# Altium PCB KNX_MCU_24CH_V1.2.PcbDoc (part 1 of 2)
Units mm, origin at the board's own origin, x right, y up, seen from the top; angles counter-clockwise.
Board outline 205.5 x 64.4 mm, 2 copper layers (F.Cu, B.Cu), stack 1.581 mm thick; 138 components, 141 nets, 447 pads, 311 vias.
Unrouted connection lines stored in the file: 65.
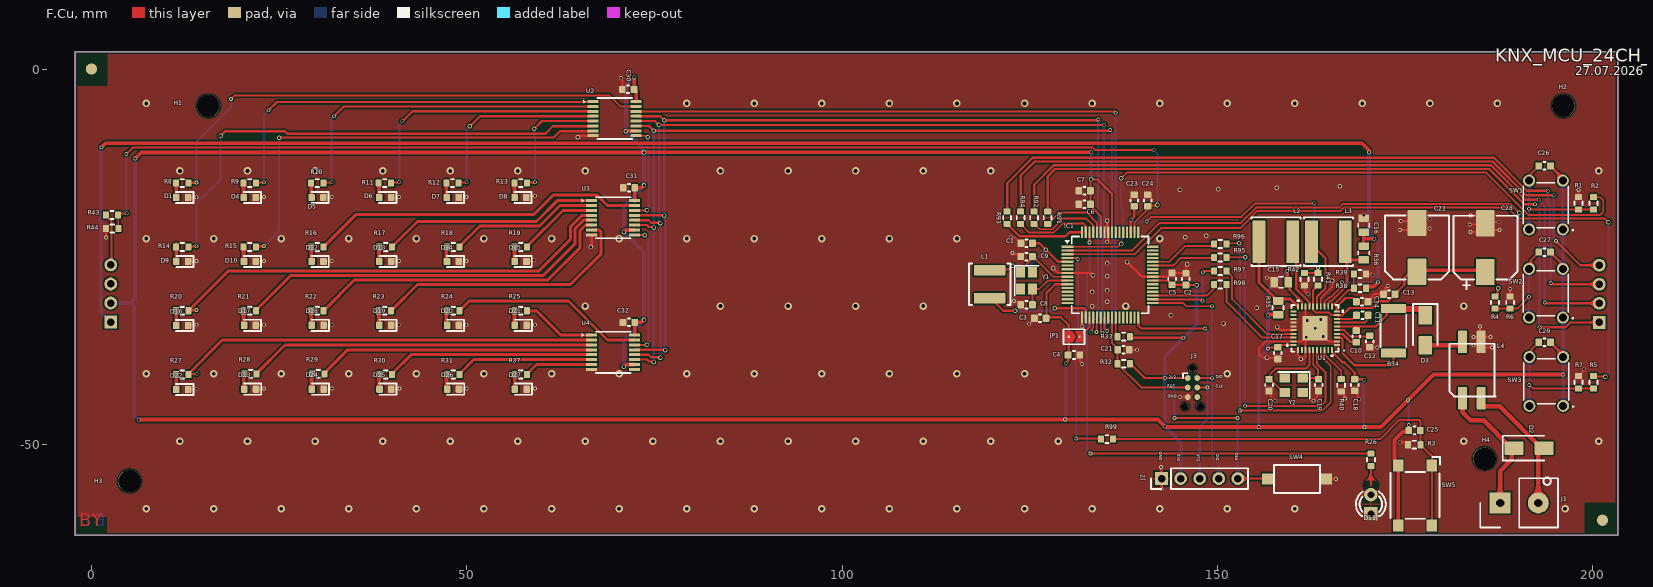
[diagram p0: F.Cu view]
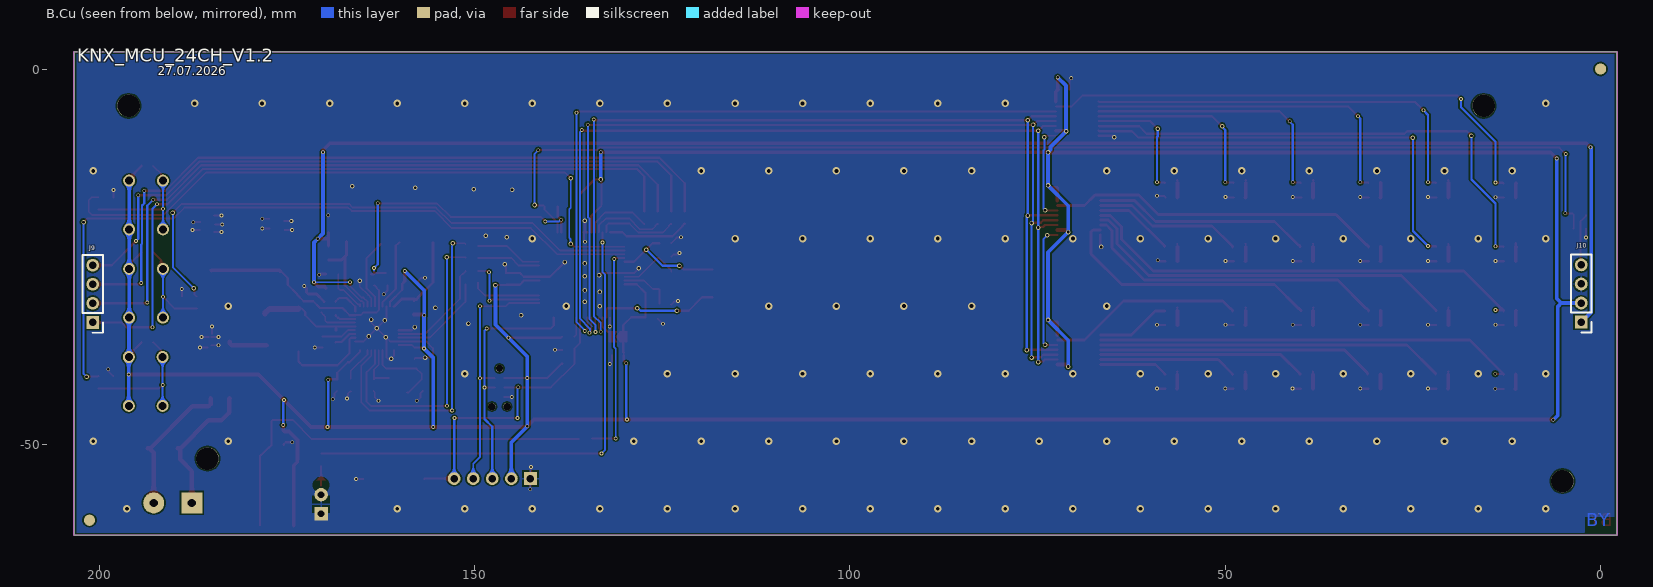
[diagram p1: B.Cu view, seen from below]

## Layer stack, top to bottom
F.Mask: solder mask 0.0102, Solder Resist, Dk 3.5
F.Cu: signal copper 0.0356
Dielectric 1: dielectric 1.51, FR-4, Dk 4.8
B.Cu: signal copper 0.0356
B.Mask: solder mask 0.0102, Solder Resist, Dk 3.5

## Board outline
-2.17,-62.1 -2.17,2.3 203.33,2.3 203.33,-62.1

## Design rules (kind name [scope] priority, off if disabled: settings)
Clearance "Clearence 0,5_Polygon" [InNamedPolygon('F.Cu--2') OR InNamedPolygon('B.Cu--2') OR InNamedPolygon('F.Cu--3') OR InNamedPolygon('B.Cu--3')] p1: gap=0.5 ignorepadtopadclearanceinfootprint=FALSE
Clearance "Clearence 0,4_Polygon" [InNamedPolygon('F.Cu--1') OR InNamedPolygon('B.Cu--1')] p2: gap=0.4 ignorepadtopadclearanceinfootprint=FALSE
Clearance "Clearence 0,3_Polygon" [InNamedPolygon('F.Cu-') OR InNamedPolygon('B.Cu-')] p3: gap=0.3 ignorepadtopadclearanceinfootprint=FALSE
Clearance [All] p4: gap=0.2 ignorepadtopadclearanceinfootprint=TRUE
ComponentClearance [All] p1: gap=0 collisioncheckmode=3 verticalgap=0.01 showdistances=FALSE
MinimumSolderMaskSliver [All] p1: minsoldermaskwidth=0
PolygonConnect [All] p1: thpad.connectstyle=Relief thpad.reliefconductorwidth=0.254 thpad.reliefentries=4 thpad.polygonreliefangle="90 Angle" thpad.airgapwidth=0.254 smdpad.connectstyle=Direct smdpad.reliefconductorwidth=0.254 smdpad.reliefentries=4 smdpad.polygonreliefangle="90 Angle" smdpad.airgapwidth=0.254 via.connectstyle=Direct via.reliefconductorwidth=0.254 via.reliefentries=4 via.polygonreliefangle="90 Angle" via.airgapwidth=0.254
PolygonConnect Polygon_B.Cu--3_ConnectDirect [IsNamedPolygon('B.Cu--3') vs IsVia] p2: connectstyle=Direct reliefconductorwidth=0.254 reliefentries=4 polygonreliefangle="90 Angle" airgapwidth=0.254
PolygonConnect Polygon_B.Cu--3_ConnectRelief45 [IsNamedPolygon('B.Cu--3') vs (IsThruPin or IsSMTPin) and (PadShape_AllLayers = 'Round')] p3: connectstyle=Relief reliefconductorwidth=0.4 reliefentries=4 polygonreliefangle="45 Angle" airgapwidth=0.4
PolygonConnect Polygon_B.Cu--3_ConnectRelief90 [IsNamedPolygon('B.Cu--3') vs (IsThruPin or IsSMTPin) and (PadShape_AllLayers <> 'Round')] p4: connectstyle=Relief reliefconductorwidth=0.4 reliefentries=4 polygonreliefangle="90 Angle" airgapwidth=0.4
PolygonConnect Polygon_F.Cu--3_ConnectDirect [IsNamedPolygon('F.Cu--3') vs IsVia] p5: connectstyle=Direct reliefconductorwidth=0.254 reliefentries=4 polygonreliefangle="90 Angle" airgapwidth=0.254
PolygonConnect Polygon_F.Cu--3_ConnectRelief45 [IsNamedPolygon('F.Cu--3') vs (IsThruPin or IsSMTPin) and (PadShape_AllLayers = 'Round')] p6: connectstyle=Relief reliefconductorwidth=0.4 reliefentries=4 polygonreliefangle="45 Angle" airgapwidth=0.4
PolygonConnect Polygon_F.Cu--3_ConnectRelief90 [IsNamedPolygon('F.Cu--3') vs (IsThruPin or IsSMTPin) and (PadShape_AllLayers <> 'Round')] p7: connectstyle=Relief reliefconductorwidth=0.4 reliefentries=4 polygonreliefangle="90 Angle" airgapwidth=0.4
PolygonConnect Polygon_B.Cu--2_ConnectDirect [IsNamedPolygon('B.Cu--2') vs IsVia] p8: connectstyle=Direct reliefconductorwidth=0.254 reliefentries=4 polygonreliefangle="90 Angle" airgapwidth=0.254
PolygonConnect Polygon_B.Cu--2_ConnectRelief45 [IsNamedPolygon('B.Cu--2') vs (IsThruPin or IsSMTPin) and (PadShape_AllLayers = 'Round')] p9: connectstyle=Relief reliefconductorwidth=0.4 reliefentries=4 polygonreliefangle="45 Angle" airgapwidth=0.4
PolygonConnect Polygon_B.Cu--2_ConnectRelief90 [IsNamedPolygon('B.Cu--2') vs (IsThruPin or IsSMTPin) and (PadShape_AllLayers <> 'Round')] p10: connectstyle=Relief reliefconductorwidth=0.4 reliefentries=4 polygonreliefangle="90 Angle" airgapwidth=0.4
PolygonConnect Polygon_F.Cu--2_ConnectDirect [IsNamedPolygon('F.Cu--2') vs IsVia] p11: connectstyle=Direct reliefconductorwidth=0.254 reliefentries=4 polygonreliefangle="90 Angle" airgapwidth=0.254
PolygonConnect Polygon_F.Cu--2_ConnectRelief45 [IsNamedPolygon('F.Cu--2') vs (IsThruPin or IsSMTPin) and (PadShape_AllLayers = 'Round')] p12: connectstyle=Relief reliefconductorwidth=0.4 reliefentries=4 polygonreliefangle="45 Angle" airgapwidth=0.4
PolygonConnect Polygon_F.Cu--2_ConnectRelief90 [IsNamedPolygon('F.Cu--2') vs (IsThruPin or IsSMTPin) and (PadShape_AllLayers <> 'Round')] p13: connectstyle=Relief reliefconductorwidth=0.4 reliefentries=4 polygonreliefangle="90 Angle" airgapwidth=0.4
PolygonConnect Polygon_B.Cu--1_ConnectDirect [IsNamedPolygon('B.Cu--1') vs IsVia] p14: connectstyle=Direct reliefconductorwidth=0.254 reliefentries=4 polygonreliefangle="90 Angle" airgapwidth=0.254
PolygonConnect Polygon_B.Cu--1_ConnectRelief45 [IsNamedPolygon('B.Cu--1') vs (IsThruPin or IsSMTPin) and (PadShape_AllLayers = 'Round')] p15: connectstyle=Relief reliefconductorwidth=0.4 reliefentries=4 polygonreliefangle="45 Angle" airgapwidth=0.4
PolygonConnect Polygon_B.Cu--1_ConnectRelief90 [IsNamedPolygon('B.Cu--1') vs (IsThruPin or IsSMTPin) and (PadShape_AllLayers <> 'Round')] p16: connectstyle=Relief reliefconductorwidth=0.4 reliefentries=4 polygonreliefangle="90 Angle" airgapwidth=0.4
PolygonConnect Polygon_F.Cu--1_ConnectDirect [IsNamedPolygon('F.Cu--1') vs IsVia] p17: connectstyle=Direct reliefconductorwidth=0.254 reliefentries=4 polygonreliefangle="90 Angle" airgapwidth=0.254
PolygonConnect Polygon_F.Cu--1_ConnectRelief45 [IsNamedPolygon('F.Cu--1') vs (IsThruPin or IsSMTPin) and (PadShape_AllLayers = 'Round')] p18: connectstyle=Relief reliefconductorwidth=0.4 reliefentries=4 polygonreliefangle="45 Angle" airgapwidth=0.4
PolygonConnect Polygon_F.Cu--1_ConnectRelief90 [IsNamedPolygon('F.Cu--1') vs (IsThruPin or IsSMTPin) and (PadShape_AllLayers <> 'Round')] p19: connectstyle=Relief reliefconductorwidth=0.4 reliefentries=4 polygonreliefangle="90 Angle" airgapwidth=0.4
PolygonConnect Polygon_B.Cu-_ConnectDirect [IsNamedPolygon('B.Cu-') vs IsVia] p20: connectstyle=Direct reliefconductorwidth=0.254 reliefentries=4 polygonreliefangle="90 Angle" airgapwidth=0.254
PolygonConnect Polygon_B.Cu-_ConnectRelief45 [IsNamedPolygon('B.Cu-') vs (IsThruPin or IsSMTPin) and (PadShape_AllLayers = 'Round')] p21: connectstyle=Relief reliefconductorwidth=0.3 reliefentries=4 polygonreliefangle="45 Angle" airgapwidth=0.3
PolygonConnect Polygon_B.Cu-_ConnectRelief90 [IsNamedPolygon('B.Cu-') vs (IsThruPin or IsSMTPin) and (PadShape_AllLayers <> 'Round')] p22: connectstyle=Relief reliefconductorwidth=0.3 reliefentries=4 polygonreliefangle="90 Angle" airgapwidth=0.3
PolygonConnect Polygon_F.Cu-_ConnectDirect [IsNamedPolygon('F.Cu-') vs IsVia] p23: connectstyle=Direct reliefconductorwidth=0.254 reliefentries=4 polygonreliefangle="90 Angle" airgapwidth=0.254
PolygonConnect Polygon_F.Cu-_ConnectRelief45 [IsNamedPolygon('F.Cu-') vs (IsThruPin or IsSMTPin) and (PadShape_AllLayers = 'Round')] p24: connectstyle=Relief reliefconductorwidth=0.3 reliefentries=4 polygonreliefangle="45 Angle" airgapwidth=0.3
PolygonConnect Polygon_F.Cu-_ConnectRelief90 [IsNamedPolygon('F.Cu-') vs (IsThruPin or IsSMTPin) and (PadShape_AllLayers <> 'Round')] p25: connectstyle=Relief reliefconductorwidth=0.3 reliefentries=4 polygonreliefangle="90 Angle" airgapwidth=0.3
RoutingVias [All] p1: holewidth=0.711 width=1.27 viastyle="Through Hole" minholewidth=0.711 minwidth=1.27 maxholewidth=0.711 maxwidth=1.27
SilkToSilkClearance [All] p1: silktosilkclearance=0
SilkToSolderMaskClearance [IsPad] p1: minsilkscreentomaskgap=0 clearancetoexposedcopper=TRUE
SolderMaskExpansion [All] p1: expansion=0 istentingtop=FALSE
SupplyNets "Schematic Supply Nets_3" [InNet('+3V3')] p1: voltage=0.000
SupplyNets "Schematic Supply Nets_2" [InNet('GND')] p2: voltage=0.000
SupplyNets "Schematic Supply Nets" [InNet('+12V')] p3: voltage=0.000
Width [All] p1: maxlimit=10 minlimit=0.2 preferedwidth=0.254 minimp=50.000000 maximp=50.000000 favimp=50.000000
26 further rules are at their usual default settings.

## Classes and differential pairs
component class UI_BUTTON_LED: C26 C27 C29 C30 C31 C32 D1 D4 D5 D6 D7 D8 D9 D10 D12 D13 D14 D15 D16 D17 D18 D19 D20 D21 D22 D23 D24 D25 D26 D27 R1 R2 R4 R5 R6 R7 R8 R9 R10 R11 R12 R13 R14 R15 R16 R17 R18 R19 R20 R21 R22 R23 R24 R25 R27 R28 R29 R30 R31 R37 SW1 SW2 SW3 U2 U3 U4
component class "Transceiver for KNx": C10 C11 C12 C13 C14 C15 C16 C17 C18 C19 C20 C22 C28 D2 D3 L2 L3 L4 R34 R35 R36 R38 R39 R40 U1 Y2
component class MCU: C1 C2 C3 C4 C5 C6 C7 C8 C9 C21 IC1 JP1 L1 R32 R33 SW4 Y1
component class KNX-MCU-CONTROL_V0.2: C23 C24 C25 D11 H1 H2 H3 H4 J1 J2 J3 R3 R26 R41 R42 R43 R44 R95 R96 R97 R98 R99 SW5
component class Connectors: J9 J10 R91 R92 R93 R94

## Components (designator, comment, footprint, x,y, rotation, side; value= is the part's Value field where it differs from the comment)
C1 "4.7uF" C_0603_1608METRIC 124.58,-23.2 r0 top
C2 "1uF" C_0603_1608METRIC 145.788,-27.987 r270 top
C3 "100nF" C_0603_1608METRIC 126.38,-33.2 r0 top
C4 "100nF" C_0603_1608METRIC 130.88,-38.1 r180 top
C5 "100nF" C_0603_1608METRIC 143.948,-27.957 r270 top
C6 "100nF" C_0603_1608METRIC 132.3,-18.013 r0 top
C7 "2.2uF" C_0603_1608METRIC 132.3,-16.213 r0 top
C8 "15pF" C_0603_1608METRIC 124.58,-31.4 r180 top
C9 "15pF" C_0603_1608METRIC 124.58,-25 r180 top
C10 "47nF" C_0603_1608METRIC 168.48,-35.625 r90 top
C11 "220nF" C_0603_1608METRIC 169.28,-32.8 r0 top
C12 "100nF" C_0603_1608METRIC 170.28,-36.3 r90 top
C13 "100nF" C_0603_1608METRIC 172.88,-30 r180 top
C14 "1uF" C_0603_1608METRIC 169.28,-31 r180 top
C15 "10uF" C_0805_2012Metric 158.48,-28.4 r0 top
C16 "10uF" C_0805_2012Metric 169.48,-20.8 r270 top
C17 "100nF" C_0603_1608METRIC 158.027,-37.852 r90 top
C18 "100nF" C_0603_1608METRIC 168.28,-42.1 r90 top
C19 "10pF" C_0603_1608METRIC 163.48,-42.1 r270 top
C20 "10pF" C_0603_1608METRIC 156.88,-42.1 r270 top
C21 "100nF" C_0603_1608METRIC 137.48,-37.4 r180 top
C22 "100uF" CP_Elec_8x10#1 176.58,-23.75 r90 top
C23 "100nF" C_0603_1608METRIC 138.9,-17.512 r90 top
C24 "100nF" C_0603_1608METRIC 140.7,-17.512 r90 top
C25 "100nF" C_0603_1608METRIC 176.252,-48.143 r180 top
C26 "100nF" C_0603_1608METRIC 193.58,-12.9 r180 top
C27 "100nF" C_0603_1608METRIC 193.58,-24.4 r180 top
C28 "470uf/16V" CP_Elec_8x10#2 185.68,-23.8 r270 top
C29 "100nF" C_0603_1608METRIC 193.58,-36.4 r180 top
C30 "100nF" C_0603_1608METRIC 71.5,-2.713 r180 top
C31 "100nF" C_0603_1608METRIC 71.6,-15.813 r0 top
C32 "100nF" C_0603_1608METRIC 71.594,-33.736 r0 top
D1 "LED" LED_0603_1608METRIC 12.093,-17.113 r180 top locked
D2 "SMAJ40CA-HT" D_SMA 191.5,-50.5 r0 top
D3 "SS28" D_SMA 177.68,-34.8 r270 top
D4 "LED" LED_0603_1608METRIC 21.105,-17.113 r180 top locked
D5 "LED" LED_0603_1608METRIC 30.118,-17.113 r180 top locked
D6 "LED" LED_0603_1608METRIC 39.13,-17.113 r180 top locked
D7 "LED" LED_0603_1608METRIC 48.143,-17.113 r180 top locked
D8 "LED" LED_0603_1608METRIC 57.155,-17.113 r180 top locked
D9 "LED" LED_0603_1608METRIC 12.105,-25.625 r180 top locked
D10 "LED" LED_0603_1608METRIC 21.118,-25.625 r180 top locked
D11 "Led_Green" LED_D3.0MM 170.43,-57.97 r90 top locked
D12 "LED" LED_0603_1608METRIC 30.13,-25.625 r180 top locked
D13 "LED" LED_0603_1608METRIC 39.143,-25.625 r180 top locked
D14 "LED" LED_0603_1608METRIC 48.155,-25.625 r180 top locked
D15 "LED" LED_0603_1608METRIC 57.168,-25.625 r180 top locked
D16 "LED" LED_0603_1608METRIC 12.093,-34.162 r180 top locked
D17 "LED" LED_0603_1608METRIC 21.13,-34.137 r180 top locked
D18 "LED" LED_0603_1608METRIC 30.143,-34.137 r180 top locked
D19 "LED" LED_0603_1608METRIC 39.155,-34.137 r180 top locked
D20 "LED" LED_0603_1608METRIC 48.168,-34.137 r180 top locked
D21 "LED" LED_0603_1608METRIC 57.18,-34.137 r180 top locked
D22 "LED" LED_0603_1608METRIC 12.093,-42.687 r180 top locked
D23 "LED" LED_0603_1608METRIC 21.143,-42.65 r180 top locked
D24 "LED" LED_0603_1608METRIC 30.155,-42.65 r180 top locked
D25 "LED" LED_0603_1608METRIC 39.168,-42.65 r180 top locked
D26 "LED" LED_0603_1608METRIC 48.18,-42.65 r180 top locked
D27 "LED" LED_0603_1608METRIC 57.193,-42.65 r180 top locked
H1 "MountingHole" MOUNTINGHOLE_3MM 15.58,-4.9 r270 top
H2 "MountingHole" MOUNTINGHOLE_3MM 196.08,-4.9 r270 top
H3 "MountingHole" MOUNTINGHOLE_3MM 5.08,-54.9 r270 top
H4 "MountingHole" MOUNTINGHOLE_3MM 185.58,-51.9 r270 top
IC1 "R7FA2L1AB3CFM" LQFP-64_10X10MM_P0.5MM 135.693,-27.427 r0 top locked
J1 "L-KLS8-2170-13" SAMTEC_HPM-02-01-X-S_STRAIGHT_1X02_PITCH5.08MM 187.65,-57.8 r90 top locked
J2 "Conn_01x05" PinHeader_1x05_P2.54mm_Vertical 142.548,-54.557 r90 top
J3 "Conn_ARM_SWD_TagConnect_TC2030-NL" Tag-Connect_TC2030-IDC-NL_2x03_P1.27mm_Vertical 146.673,-42.427 r270 top
J9 "Conn_01x04" PINHEADER_1X04_P2.54MM_VERTICAL 200.86,-33.75 r0 bottom locked
J10 "Conn_01x04" PINHEADER_1X04_P2.54MM_VERTICAL 2.58,-33.71 r0 bottom locked
JP1 "SolderJumper_2_Open" SolderJumper-2_P1.3mm_Open_TrianglePad1.0x1.5mm 130.908,-35.657 r0 top
L1 "4.7uH" L_APV_ANR5012 119.65,-28.68 r270 top
L2 "220uH" L_APV_ANR6028 157.78,-23 r180 top
L3 "220uH" L_APV_ANR6028 164.78,-23 r0 top
L4 "50474C" L_CommonMode_50474C_7.5x5.9mm 183.88,-40.1 r90 top
R1 "10k" R_0603_1608METRIC 198.08,-17.9 r90 top
R2 "330R" R_0603_1608METRIC 200.08,-17.9 r270 top
R3 "10K" R_0603_1608METRIC 176.227,-50.043 r0 top
R4 "330R" R_0603_1608METRIC 186.98,-31.1 r270 top
R5 "330R" R_0603_1608METRIC 200.08,-41.725 r270 top
R6 "10k" R_0603_1608METRIC 188.98,-31.1 r90 top
R7 "10k" R_0603_1608METRIC 198.08,-41.725 r90 top
R8 "1k" R_0603_1608METRIC 12.1,-15.2 r180 top
R9 "1k" R_0603_1608METRIC 21.1,-15.2 r180 top
R10 "1k" R_0603_1608METRIC 30.1,-15.2 r180 top
R11 "1k" R_0603_1608METRIC 39.1,-15.2 r180 top
R12 "1k" R_0603_1608METRIC 48.1,-15.2 r180 top
R13 "1k" R_0603_1608METRIC 57.2,-15.2 r180 top
R14 "1k" R_0603_1608METRIC 12.1,-23.7 r180 top
R15 "1k" R_0603_1608METRIC 21.1,-23.7 r180 top
R16 "1k" R_0603_1608METRIC 30.1,-23.7 r180 top
R17 "1k" R_0603_1608METRIC 39.2,-23.7 r180 top
R18 "1k" R_0603_1608METRIC 48.2,-23.7 r180 top
R19 "1k" R_0603_1608METRIC 57.2,-23.7 r180 top
R20 "1k" R_0603_1608METRIC 12.1,-32.2 r180 top
R21 "1k" R_0603_1608METRIC 21.1,-32.2 r180 top
R22 "1k" R_0603_1608METRIC 30.1,-32.2 r180 top
R23 "1k" R_0603_1608METRIC 39.1,-32.2 r180 top
R24 "1k" R_0603_1608METRIC 48.2,-32.2 r180 top
R25 "1k" R_0603_1608METRIC 57.2,-32.2 r180 top
R26 "1K" R_0603_1608METRIC 170.43,-52.07 r270 top
R27 "1k" R_0603_1608METRIC 12.1,-40.7 r180 top
R28 "1k" R_0603_1608METRIC 21.2,-40.6 r180 top
R29 "1k" R_0603_1608METRIC 30.2,-40.6 r180 top
R30 "1k" R_0603_1608METRIC 39.2,-40.7 r180 top
R31 "1k" R_0603_1608METRIC 48.2,-40.7 r180 top
R32 "10K" R_0603_1608METRIC 137.498,-39.257 r0 top
R33 "10K" R_0603_1608METRIC 137.508,-35.657 r0 top
R34 "27R" R_2512_6332Metric 173.437,-34.872 r270 top
R35 "1R" R_0805_2012Metric 158.08,-31.8 r270 top
R36 "1R" R_0805_2012Metric 169.48,-24.5 r90 top
R37 "1k" R_0603_1608METRIC 57.2,-40.7 r180 top
R38 "91K" R_0603_1608METRIC 168.98,-29.2 r180 top
R39 "10K" R_0603_1608METRIC 168.98,-27.3 r0 top
R40 "20k" R_0603_1608METRIC 166.477,-42.122 r90 top
R41 "220k" R_0603_1608METRIC 163.38,-28 r90 top
R42 "27k" R_0603_1608METRIC 161.58,-28 r270 top
R43 "100k" R_0603_1608METRIC 2.746,-19.439 r0 top
R44 "27k" R_0603_1608METRIC 2.766,-21.249 r180 top
R91 "33R" R_0603_1608METRIC 127.38,-19.8 r90 top
R92 "33R" R_0603_1608METRIC 125.58,-19.8 r90 top
R93 "33R" R_0603_1608METRIC 121.98,-19.8 r90 top
R94 "33R" R_0603_1608METRIC 123.78,-19.8 r90 top
R95 "33R" R_0603_1608METRIC 150.38,-25.1 r180 top
R96 "33R" R_0603_1608METRIC 150.38,-23.3 r180 top
R97 "33R" R_0603_1608METRIC 150.38,-26.9 r180 top
R98 "33R" R_0603_1608METRIC 150.38,-28.7 r180 top
R99 "330R" R_0603_1608METRIC 135.28,-49.3 r180 top
SW1 "TL1105BF160Q" TL1105 193.748,-18.117 r90 top locked
SW2 "TL1105BF160Q" TL1105 193.748,-29.867 r90 top locked
SW3 "TL1105BF160Q" TL1105 193.798,-41.617 r90 top locked
SW4 "SW_Push" SW_SPST_CK_RS282G05A3 160.58,-54.6 r0 top
SW5 "SW_Push" SW_SPST_OMRON_B3FS-100XP 176.32,-56.8 r270 top locked
U1 "NCN5130MNTWG" QFN40_485AU-01_ONS 162.997,-34.532 r180 top locked
U2 "74HC595PW,118" TSSOP-16_4.4X5MM_P0.65MM 69.7,-6.613 r0 top
U3 "74HC595PW,118" TSSOP-16_4.4X5MM_P0.65MM 69.5,-19.813 r0 top
U4 "74HC595PW,118" TSSOP-16_4.4X5MM_P0.65MM 69.5,-37.73 r0 top
Y1 "20Mhz" Crystal_SMD_SeikoEpson_FA238-4Pin_3.2x2.5mm 124.588,-28.202 r270 top
Y2 "16Mhz" Crystal_SMD_SeikoEpson_FA238V-4Pin_3.2x2.5mm 160.187,-42.122 r180 top

## Footprints (in the part's own frame and the unit in brackets; to place one, negate y for a bottom-side part, rotate by r counter-clockwise, add the part's x,y. Pads: shape width x height; smd on the part's side, far side on the other; paste and mask are expansions set on the pad)
C_0603_1608METRIC [mm]
  rrect25% 0.9x0.95 smd mask+0.05: 1(-0.771,-0.005) 2(0.779,-0.005)
  silkscreen extent -0.14,-0.52 0.14,0.5
C_0805_2012Metric [mm]
  rrect25% 1x1.45 smd mask+0.05: 1(-0.95,0) 2(0.95,0)
  silkscreen extent -0.26,-0.73 0.26,0.73
CP_Elec_8x10#1 [mm]
  rrect10% 3.5x2.5 smd mask+0.05: 1(-3.25,0) 2(3.25,0)
  silkscreen extent -4.26,-4.26 4.26,4.26
CP_Elec_8x10#2 [mm]
  rrect10% 3.5x2.5 smd mask+0.05: 1(3.25,0) 2(-3.25,0)
  silkscreen extent -4.26,-4.26 5.5,4.26
Crystal_SMD_SeikoEpson_FA238-4Pin_3.2x2.5mm [mm]
  rect 1.4x1.2 smd mask+0.05: 1(-1.1,-0.8) 2(1.1,0.8) 3(1.1,-0.8) 4(-1.1,0.8)
  silkscreen extent -2,-1.6 2,1.6
Crystal_SMD_SeikoEpson_FA238V-4Pin_3.2x2.5mm [mm]
  rect 1.4x1.2 smd mask+0.05: 1(-1.2,-0.95) 2(1.2,-0.95) 3(1.2,0.95) 4(-1.2,0.95)
  silkscreen extent -2.1,-1.75 2.1,1.75
D_SMA [mm]
  rrect14% 2.5x1.8 smd mask+0.05: 1(-2,0) 2(2,0)
  silkscreen extent -3.51,-1.65 2,1.65
L_APV_ANR5012 [mm]
  rrect18% 1.4x4.2 smd mask+0.05: 1(-1.85,0) 2(1.85,0)
  silkscreen extent -2.76,-2.76 2.76,2.76
L_APV_ANR6028 [mm]
  rrect15% 1.7x5.7 smd mask+0.05: 1(-2.25,0) 2(2.25,0)
  silkscreen extent -3.26,-3.26 3.26,3.26
L_CommonMode_50474C_7.5x5.9mm [mm]
  rrect20% 3x1.2 smd mask+0.05: 1(-3.75,1.25) 2(-3.75,-1.25) 3(3.75,-1.25) 4(3.75,1.25)
  silkscreen extent -3.5,-3.14 3.5,3
LED_0603_1608METRIC [mm]
  rrect25% 0.875x0.95 smd mask+0.05: 1(-0.787,0) 2(0.787,0)
  silkscreen extent -1.49,-0.73 0.8,0.73, body extent -0.86,-0.4 0.74,0.4, height 0.6
LED_D3.0MM [mm]
  rect 1.8x1.8 hole 0.9 mask+0.05: 1(-1.27,0)
  round 1.8 hole 0.9 mask+0.05: 2(1.27,0)
  silkscreen extent -1.56,-1.99 1.67,1.99, body extent -1.6,-1.6 1.6,1.6, height 13
LQFP-64_10X10MM_P0.5MM [mm]
  rrect25% 1.55x0.3 smd mask+0.05: 1(-5.675,3.75) 2(-5.675,3.25) 3(-5.675,2.75) 4(-5.675,2.25) 5(-5.675,1.75) 6(-5.675,1.25) 7(-5.675,0.75) 8(-5.675,0.25) 9(-5.675,-0.25) 10(-5.675,-0.75) 11(-5.675,-1.25) 12(-5.675,-1.75) 13(-5.675,-2.25) 14(-5.675,-2.75) 15(-5.675,-3.25) 16(-5.675,-3.75) 33(5.675,-3.75) 34(5.675,-3.25) 35(5.675,-2.75) 36(5.675,-2.25) 37(5.675,-1.75) 38(5.675,-1.25) 39(5.675,-0.75) 40(5.675,-0.25) 41(5.675,0.25) 42(5.675,0.75) 43(5.675,1.25) 44(5.675,1.75) 45(5.675,2.25) 46(5.675,2.75) 47(5.675,3.25) 48(5.675,3.75)
  rrect25% 0.3x1.55 smd mask+0.05: 17(-3.75,-5.675) 18(-3.25,-5.675) 19(-2.75,-5.675) 20(-2.25,-5.675) 21(-1.75,-5.675) 22(-1.25,-5.675) 23(-0.75,-5.675) 24(-0.25,-5.675) 25(0.25,-5.675) 26(0.75,-5.675) 27(1.25,-5.675) 28(1.75,-5.675) 29(2.25,-5.675) 30(2.75,-5.675) 31(3.25,-5.675) 32(3.75,-5.675) 49(3.75,5.675) 50(3.25,5.675) 51(2.75,5.675) 52(2.25,5.675) 53(1.75,5.675) 54(1.25,5.675) 55(0.75,5.675) 56(0.25,5.675) 57(-0.25,5.675) 58(-0.75,5.675) 59(-1.25,5.675) 60(-1.75,5.675) 61(-2.25,5.675) 62(-2.75,5.675) 63(-3.25,5.675) 64(-3.75,5.675)
  silkscreen extent -6.06,-5.11 5.11,5.11, body extent -6,-6 6,6, height 1.7
MOUNTINGHOLE_3MM [mm]
  round 3 hole 3 mask+0.05: Un1(0,0)
PINHEADER_1X04_P2.54MM_VERTICAL [mm]
  rect 1.7x1.7 hole 1 mask+0.05: 1(0,0)
  round 1.7 hole 1 mask+0.05: 2(0,-2.54) 3(0,-5.08) 4(0,-7.62)
  silkscreen extent -1.38,-9 1.38,1.38, body extent -1.27,-8.98 1.27,1.31, height 15.75
PinHeader_1x05_P2.54mm_Vertical [mm]
  rect 1.7x1.7 hole 1 mask+0.05: 1(0,0)
  round 1.7 hole 1 mask+0.05: 2(0,-2.54) 3(0,-5.08) 4(0,-7.62) 5(0,-10.16)
  silkscreen extent -1.38,-11.54 1.38,1.38
QFN40_485AU-01_ONS [mil]
  rect 32x10 smd mask+1.97: 1(-114,88.58) 2(-114,68.9) 3(-114,49.21) 4(-114,29.53) 5(-114,9.84) 6(-114,-9.84) 7(-114,-29.53) 8(-114,-49.21) 9(-114,-68.9) 10(-114,-88.58) 21(114,-88.58) 22(114,-68.9) 23(114,-49.21) 24(114,-29.53) 25(114,-9.84) 26(114,9.84) 27(114,29.53) 28(114,49.21) 29(114,68.9) 30(114,88.58)
  rect 10x32 smd mask+1.97: 11(-88.58,-114) 12(-68.9,-114) 13(-49.21,-114) 14(-29.53,-114) 15(-9.84,-114) 16(9.84,-114) 17(29.53,-114) 18(49.21,-114) 19(68.9,-114) 20(88.58,-114) 31(88.58,114) 32(68.9,114) 33(49.21,114) 34(29.53,114) 35(9.84,114) 36(-9.84,114) 37(-29.53,114) 38(-49.21,114) 39(-68.9,114) 40(-88.58,114)
  rect 130x130 smd mask+1.97: 41(0,0)
  silkscreen extent -150,-150 150,150
R_0603_1608METRIC [mm]
  rrect25% 0.8x0.95 smd mask+0.05: 1(-0.825,0) 2(0.825,0)
  silkscreen extent -0.24,-0.52 0.24,0.52
R_0805_2012Metric [mm]
  rrect24% 1.025x1.4 smd mask+0.05: 1(-0.913,0) 2(0.913,0)
  silkscreen extent -0.23,-0.73 0.23,0.73
R_2512_6332Metric [mm]
  rrect20% 1.225x3.35 smd mask+0.05: 1(-2.963,0) 2(2.963,0)
  silkscreen extent -2.18,-1.71 2.18,1.71
SAMTEC_HPM-02-01-X-S_STRAIGHT_1X02_PITCH5.08MM [mm]
  rect 2.8x2.8 hole 1.1 mask+0.05: 1(0,0)
  round 2.8 hole 1.1 mask+0.05: 2(0,-5.08)
  silkscreen extent -3.28,-7.73 3.28,2.65, body extent -0.5,-5.58 0.5,0.5, height 15
SolderJumper-2_P1.3mm_Open_TrianglePad1.0x1.5mm [mm]
  rect 0.3x0.3 smd paste-0.3 mask+0.05: 1(-0.725,0) 2(0.725,0)
  F.Cu region: 0.275,0 -0.225,-0.75 -1.225,-0.75 -1.225,0.75 -0.225,0.75
  F.Cu region: 1.225,-0.75 0.075,-0.75 0.575,0 0.075,0.75 1.225,0.75
  silkscreen extent -1.4,-1 1.4,1
SW_SPST_CK_RS282G05A3 [mm]
  rect 1.5x1.5 smd mask+0.05: 1(-3.9,0) 2(3.9,0)
  silkscreen extent -3.06,-1.85 3.06,1.85
SW_SPST_OMRON_B3FS-100XP [mm]
  rect 1.6x1.4 smd mask+0.05: 1(-4,2.25) 1(4,2.25) 2(-4,-2.25) 2(4,-2.25)
  silkscreen extent -5.1,-3.25 3.1,3.3, body extent -3,-3 3,3, height 12
Tag-Connect_TC2030-IDC-NL_2x03_P1.27mm_Vertical [mil]
  round 31 smd paste-31 mask+1.97: 1(-50,-25) 2(-50,25) 3(0,-25) 4(0,25) 5(50,-25) 6(50,25)
  round 39 hole 39 mask+1.97: Un1(-100,0) Un2(100,40) Un3(100,-40)
  silkscreen extent -75,-50 -50,-25
TL1105 [mm]
  round 1.6 hole 1.06: 1(-3.25,-2.25) 2(3.25,-2.25) 3(-3.25,2.25) 4(3.25,2.25)
  silkscreen extent -3.4,-3.64 3,3, body extent -3,-3 3,3, height 20.5
TSSOP-16_4.4X5MM_P0.65MM [mm]
  rrect25% 1.475x0.4 smd mask+0.05: 1(-2.863,2.275) 2(-2.863,1.625) 3(-2.863,0.975) 4(-2.863,0.325) 5(-2.863,-0.325) 6(-2.863,-0.975) 7(-2.863,-1.625) 8(-2.863,-2.275) 9(2.863,-2.275) 10(2.863,-1.625) 11(2.863,-0.975) 12(2.863,-0.325) 13(2.863,0.325) 14(2.863,0.975) 15(2.863,1.625) 16(2.863,2.275)
  silkscreen extent -4.19,-2.74 2.31,2.74

## Part data
C1 C2 C3 C4 C5 C6 C7 C10 C11 C14 C21 C25 C26 C27 C29: library part C_3, Package=C_0603
  C1: MF="Samsung Electro-Mechanics", MP=CL10B475KQ8NQNC, OZD=C1608X7S1A475K080AC
  C2 C14: MF="Samsung Electro-Mechanics", MP=CL10B105KP8NNNC, OZD=CL10B105KP8NNNC
  C3 C4 C5 C6 C21 C25 C26 C27 C29: MF=YAGEO, MP=CC0603KRX7R9BB104
  C7: MF="Samsung Electro-Mechanics", MP=CL10B225KP8NNNC, OZD=CL10B225KP8NNNC
  C10: MF=SAMSUNG, MP=CL10B473KB8NNNC, OZD=CL10B473KB8NNNC
  C11: MF="Samsung Electro-Mechanics", MP=CL10B224KB8NNNC, OZD=CL10B224KB8NNNC
C8 C9 C19 C20: library part 20pF_0402_50V_5%, Package=C0603, MF="Samsung Electro-Mechanics"
  C8 C9: MP=CL10C150JB8NNNC, OZD=CL10C150JB8NNNC
  C19 C20: MP=CL10C100JB8NNNC, OZD=CL10C100JB8NNNC
C12 C13 C17 C18 C23 C24 C30 C31 C32: library part C_1, Package=C_0603
  C12 C13 C17 C18 C23 C24: MF="Samsung Electro-Mechanics", MP=CL10B104KB8NNNC
  C30 C31 C32: MF=YAGEO, MP=CC0603KRX7R9BB104
C15 C16: library part C_3, Package=C_0805, MF="Samsung Electro-Mechanics", MP=CL21B106KOQNNNE, OZD=CL21B106KOQNNNE
C22: library part C_US, Package="Radial D8 L10", MF=SUSCON, MP=CD035M101F10PKKKV00A
C28: library part C_US, OZD=EEEFK1C471P
D1 D4 D5 D6 D7 D8 D9 D10 D12 D13 D14 D15 D16 D17 D18 D19 D20 D21 D22 D23 D24 D25 D26 D27: Package=L_0603, MF=LITEON, MP=LTST-C190KFKT-5A, Sim.Pins="1=K 2=A"
D2: library part D_TVS, Package="DO214AC (SMA)", MF=HOTTECH, MP=SMAJ40CA-HT, OZD=SMAJ40CA-HT
D3: Package="DO214AC (SMA)", MF=HOTTECH, MP=SS18-HT, OZD=SS18-HT
D11: library part LED, Package="Through Hole,D=3mm", MF=TUOZHAN, MP=TZ-L2-03YYBYG1GDJ30-001, OZD=FYL-5014UBC1C-1MA-TR13
IC1: Package=LFQFP-64(10x10), MF=RENESAS, MP=R7FA2L1AB3CFM
J1: library part Screw_Terminal_01x02, Package="THT V/T", MF="KLS ELECTRONIC", MP=L-KLS8-2170-13, OZD=L-KLS8-2170-13
L1 L2 L3: library part L, Package="Non Standard"
  L1: Field6=NRS5030T4R7MMGJV, MF=VIKING, MP=PCD0302MT4R7, OZD=PCD0302MT4R7
  L2 L3: MF="CORE MASTER", MP=NR6028-221M
L4: library part Choke_Wurth_WE-CNSW_744232090, Package=SMD-4P,7x5.9mm, MF=muRata, MP=50474C, OZD=50474C
R1 R2 R4 R5 R6 R7 R8 R9 R10 R11 R12 R13 R14 R15 R16 R17 R18 R19 R20 R21 R22 R23 R24 R25 R27 R28 R29 R30 R31 R37: library part R, Package=R_0603
  R1 R6 R7: MF=FOJAN, MP=FRC0603J103TS
  R2 R4 R5: MF=FOJAN, MP="FRC0603J331 TS"
  R8 R9 R10 R11 R12 R13 R14 R15 R16 R17 R18 R19 R20 R21 R22 R23 R24 R25 R27 R28 R29 R30 R31 R37: MF=YAGEO, MP=RC0603JR-071KL
R3 R32 R33 R38 R39 R40 R41 R42 R43 R44 R91 R92 R93 R94 R95 R96 R97 R98 R99: library part R_US, Package=R_0603
  R3 R32 R33: MF=FOJAN, MP=FRC0603J103TS
  R38: MF=ROYALOHM, MP=0603SAF9102T5E, OZD=0603SAF9102T5E
  R39: MF=ROYALOHM, MP=PS03W4F1002T5E, OZD=PS03W4F1002T5E
  R40: MF=ROYALOHM, MP=0603SAF2002T5E, OZD=0603SAF2002T5E
  R41: MF=PANASONIC, MP=ERJ3EKF2203V
  R42 R44: MF=PANASONIC, MP=ERJ3EKF2702V
  R43: MF=YAGEO, MP=RC0603FR-07100KL
  R91 R92 R93 R94: MF=YAGEO, MP=RC0603JR-0733RL
  R95 R96 R97 R98: MF=ROYALOHM, MP=0603SAF330JT5E, OZD=0603SAF330JT5E
  R99: MF=FOJAN, MP="FRC0603J331 TS"
R26: library part R_7, Package=R0603, MF=VO, MP=SCR0603J1K
R34: library part R_US, Package=R_2512, MF=ROYALOHM, MP=HP122WF270JT4E, OZD=HP122WF270JT4E
R35 R36: library part R_US, Package=R_0805, MF=PANASONIC, MP=ERJ6RQF1R0V, OZD=ERJ6RQF1R0V
SW1 SW2 SW3: "Switch", Manufacturer_Name=E-Switch, Mouser Part Number=612-TL1105B, Datasheet Link=https://configured-product-images.s3.amazonaws.com/2D/specs/TL1105BF160Q.pdf, Manufacturer_Part_Number=TL1105BF160Q, Mouser Price/Stock=https://www.mouser.co.uk/ProductDetail/E-Switch/TL1105BF160Q?qs=YXf4ACKMM4xZnIL%2FJEeFtQ%3D%3D
SW5: Package=SMD,12x12mm, MF=kinghelm, MP=KH-12X12X8H-SMT
U1: Package=QFN-40-EP(6x6), MF=onsemi, MP=NCN5130MNTWG
U2 U3 U4: library part 74HC595, Package=TSSOP-16, MF=Nexperia, MP=74HC595PW,118
Y1: library part Crystal, Package="4-SMD 3225", MF=RALTRON, MP=FL3P2X2P5SSC, OZD=RH100-20.000-10-1010-TR
Y2: library part Crystal, Package=4-SMD, MF=RALTRON, MP=RH100-16.000-10-1010-EXT, OZD=RH100-16.000-10-1010-EXT

## Free pads (board coordinates)
  round 1.5 smd mask+1: 2(0,0) 3(201.28,-60.1)
  round 1.5 smd far side mask+1: 4(201.28,-60.1) 5(0,0)

## Via types
v1: diameter 0.5, hole 0.3, F.Cu to B.Cu, tented both sides, 144 vias
v2: diameter 1, hole 0.5, F.Cu to B.Cu, tented both sides, 98 vias
v3: diameter 0.6, hole 0.35, F.Cu to B.Cu, tented both sides, 69 vias

## Nets (pads, with @x,y where several pads share a name; then routed paths per layer and width w, separated by ;. In a path a pad name is that pad's centre, name@x,y a point inside that pad or via, vN(x,y) a via of type N, cw(c..) or ccw(c..) an arc to the next point about the centre after c; other vN are vias at no path point)
+3V3: C2.2 C3.2 C4.2 C5.2 C6.2 C7.2 C15.2 C17.2 C18.2 C25.2 C26.1 C27.1 C29.1 C30.1 C31.1 C32.1 IC1.11 IC1.39 IC1.56 IC1.59 J2.2 J3.1 J10.2 JP1.1 R32.2 R33.2 R35.2 SW1.1 SW1.2 SW2.1 SW2.2 SW3.1 SW3.2 SW5.2 U1.19 U1.30 U1.40 U2.10 U2.16 U3.10 U3.16 U4.10 U4.16 | length 614.4
  F.Cu w0.254: v1(70.5,-1.212) 70.5,-1.312 70.725,-1.537 70.725,-2.713 ; v1(124.9,-33.93) 125.593,-33.237 125.593,-33.2 ; 131.68,-38.087 131.68,-38.956 131.98,-39.256 v1(131.98,-39.3) ; v1(156.737,-37.222) 156.882,-37.077 158.027,-37.077 158.322,-36.782 U1.30@160.101,-36.782
  F.Cu w0.3: v1(129.78,-39.2) 130.105,-38.875 C4.2@130.105,-38.1 ; IC1.11@130.018,-28.677 128.388,-28.677 127.233,-29.832 127.233,-33.057 129.137,-33.057 130.183,-34.103 JP1.1@130.183,-35.657 130.183,-37.752 C4.2@130.098,-37.837 ; C6.2@133.075,-18.013 133.075,-16.332 C7.2@133.095,-16.312 ; C7.2@133.075,-16.213 133.075,-14.899 133.18,-14.794 v3(133.18,-14.713) 134.013,-14.713 135.95,-16.65 135.95,-20.469 135.943,-20.476 IC1.56@135.943,-21.752 ; C6.2@133.153,-18.273 134.443,-19.563 IC1.59@134.443,-21.752 ; R32.2@138.323,-39.257 138.408,-39.257 140.308,-41.157 v1(142.98,-41.157) J3.1@146.038,-41.157 ; R33.2@138.333,-35.657 138.477,-35.8 v1(145.465,-35.8) v1@145.48,-35.8 ; IC1.39@141.368,-28.177 143.393,-28.177 143.948,-28.732 145.758,-28.732 145.788,-28.762 147.053,-28.762 v3@147.108,-28.707 ; C15.2@159.43,-28.4 159.615,-28.585 159.615,-29.399 161.247,-31.031 U1.19@161.247,-31.636 ; U1.40@165.247,-37.427 165.247,-37.661 166.658,-39.072 166.892,-39.072 168.28,-40.46 168.28,-41.325 169.405,-41.325 v1(169.48,-41.4) ; C29.1@194.355,-36.4 194.355,-36.425 196.048,-38.118 SW3.2@196.048,-38.367 ; C27.1@194.355,-24.4 194.355,-24.425 195.75,-25.82 195.75,-26.368 SW2.2@195.998,-26.617 ; C26.1@194.355,-12.9 194.355,-12.925 195.998,-14.568 SW1.2@195.998,-14.867
  F.Cu w0.5: v1(5.83,-11.933) 6.65,-11.112 v3(73.6,-11.112) 73.613,-11.1 v1(133.18,-11.1) ; v1@6.294,-46.7 v1(129.68,-46.7) 142.08,-46.7 v1(142.98,-47.6) 143.08,-47.7 v1(155.48,-47.7) v1(169.58,-47.7) 171.78,-47.7 v1(175.38,-44.1) 178.78,-40.7 v1(196.048,-40.7) v1@196.08,-40.7 ; v3(70.9,-39.63) 71.175,-39.355 U4.10@72.363,-39.355 ; v3(70.9,-21.713) 71.175,-21.438 U3.10@72.363,-21.438 ; v3(71.2,-8.313) 71.227,-8.313 71.302,-8.238 U2.10@72.563,-8.238 ; v1(72.3,-1.112) 72.3,-2.687 72.275,-2.713 72.275,-2.738 72.563,-3.025 U2.16@72.563,-4.338 ; U4.16@72.363,-35.455 72.363,-35.23 72.369,-35.224 72.369,-33.736 72.375,-33.73 73.3,-33.73 v3(73.6,-33.43) ; U3.16@72.363,-17.538 72.363,-17.313 72.369,-17.306 72.369,-15.819 72.375,-15.813 73.3,-15.813 v3(73.6,-15.513) ; v1(156.68,-32.8) 156.768,-32.712 R35.2@158.08,-32.712 ; v1(159.28,-26.9) 159.28,-28.25 C15.2@159.43,-28.4 ; SW5.2@174.07,-60.8 SW5.2@174.07,-52.8 173.62,-52.35 173.62,-51.997 173.58,-51.957 173.58,-49.41 174.702,-48.288 175.331,-48.288 175.477,-48.143 v1(175.477,-47.413)
  B.Cu w0.3: v1(129.68,-46.7) 129.78,-46.6 v1(129.78,-39.2) ; v1(169.48,-41.4) 169.48,-47.6 v1(169.58,-47.7) ; v1(175.38,-44.1) 175.418,-44.138 175.418,-44.28 175.477,-44.338 175.477,-45.786 v1(175.477,-47.413)
  B.Cu w0.5: J10.2@2.58,-31.17 5.231,-31.17 ; v1(5.83,-11.933) 5.83,-30.571 5.231,-31.17 ; v1(6.294,-46.706) 5.694,-46.106 5.694,-31.634 5.231,-31.17 ; v3(70.9,-39.63) 70.9,-36.13 v3(73.6,-33.43) 73.6,-24.413 v3(70.9,-21.713) 70.9,-18.213 v3(73.6,-15.513) v3(73.6,-11.112) 73.6,-11.085 73.272,-10.758 73.272,-10.385 v3(71.2,-8.313) 71.2,-2.213 v1(72.3,-1.112) ; v3(133.18,-14.713) v1(133.18,-11.1) ; J2.2@145.088,-54.557 145.088,-49.708 v1(142.98,-47.6) v1(142.98,-41.157) 142.98,-38.285 v1(145.465,-35.8) 147.208,-34.057 v3(147.208,-28.807) ; v1(155.48,-47.7) 155.48,-38.478 v1(156.737,-37.222) 156.737,-32.857 v1(156.68,-32.8) 156.68,-29.5 v1(159.28,-26.9) ; SW1.2@195.998,-14.867 SW1.1@195.998,-21.367 SW2.2@195.998,-26.617 SW2.1@195.998,-33.117 196.023,-33.142 196.023,-38.342 SW3.2@196.048,-38.367 v1(196.048,-40.7) SW3.1@196.048,-44.867
+12V: C16.2 J10.1 R36.2 R38.1 U1.13 | length 225.7
  F.Cu w0.254: U1.13@164.247,-31.636 164.247,-31.004 164.798,-30.453 164.988,-30.453 166.533,-28.908 166.533,-28.447 v1(166.58,-28.4)
  F.Cu w0.4: R36.2@169.48,-23.587 169.48,-22.669 C16.2@169.48,-21.75
  F.Cu w0.5: v1(1.33,-10.433) 1.863,-9.9 169.255,-9.9 170.18,-10.825 v1(170.18,-11.1) ; 169.48,-22.669 169.549,-22.6 v1(170.88,-22.6) ; R38.1@169.805,-29.2 169.805,-29.125 169.955,-28.975 170.805,-28.975 v1(171.38,-28.4)
  B.Cu w0.254: v1(166.58,-28.4) v1(171.38,-28.4)
  B.Cu w0.5: v1(1.33,-10.433) 1.23,-10.533 1.23,-32.36 J10.1@2.58,-33.71 ; v1(170.18,-11.1) 170.18,-21.9 v1(170.88,-22.6) 171.38,-23.1 v1(171.38,-28.4)
-A: D2.2 J1.2 L4.2 | length 19.3
  F.Cu w0.6: L4.2@185.13,-43.85 185.13,-44.63 185.43,-44.93 187.58,-44.93 193.15,-50.5 D2.2@193.5,-50.5 193.33,-50.5 192.73,-51.1 J1.2@192.73,-57.8
A: D2.1 J1.1 L4.1 | length 18.8
  F.Cu w0.6: L4.1@182.63,-43.85 182.7,-43.92 182.7,-45.8 183.7,-46.8 185.45,-46.8 189.15,-50.5 D2.1@189.5,-50.5 189.2,-50.8 189.2,-52 187.65,-53.55 J1.1@187.65,-57.8
BTN_DOWN: IC1.3 R5.1 | length 97.9
  F.Cu w0.25: IC1.3@130.018,-24.677 139.003,-24.677 142.48,-21.2 153.016,-21.2 155.316,-18.9 166.38,-18.9 166.855,-18.425 177.891,-18.425 177.916,-18.45 188.63,-18.45 190.08,-19.9 201.58,-19.9 v3(202.08,-20.4) ; R5.1@200.08,-40.9 200.13,-40.95 201.63,-40.95 v3(201.68,-41)
  B.Cu w0.25: v3(201.68,-41) 202.08,-40.6 v3(202.08,-20.4)
BTN_ENTER: IC1.2 R4.1 | length 75.8
  F.Cu w0.25: IC1.2@130.018,-24.177 138.603,-24.177 142.28,-20.5 153.08,-20.5 155.13,-18.45 166.194,-18.45 166.669,-17.975 178.078,-17.975 178.103,-18 189.064,-18 v3(190.222,-19.158) ; R4.1@186.98,-30.275 187.038,-30.275 187.313,-30 187.313,-29.267 v3(187.38,-29.2)
  B.Cu w0.25: v3(187.38,-29.2) 190.18,-26.4 190.18,-19.2 v3(190.222,-19.158)
BTN_UP: IC1.1 R2.1 | length 86.2
  F.Cu w0.25: IC1.1@130.018,-23.677 136.683,-23.677 137.06,-23.3 v3(137.155,-23.3) ; v3(137.184,-14.544) 137.927,-13.8 185.78,-13.8 191.43,-19.45 200.93,-19.45 201.38,-19 201.38,-17.5 200.955,-17.075 R2.1@200.08,-17.075
  B.Cu w0.25: v3(137.155,-23.3) 137.222,-23.233 137.222,-22.658 137.38,-22.5 137.38,-18.667 137.184,-18.471 v3(137.184,-14.544)
CLK: IC1.32 J2.3 J3.4 | length 32.1
  F.Cu w0.3: IC1.32@139.443,-33.102 139.443,-34.163 139.837,-34.557 v1(148.38,-34.557) ; J3.4@147.308,-42.427 v1(148.673,-42.427)
  B.Cu w0.3: J2.3@147.628,-54.557 147.628,-47.652 148.673,-46.607 v1(148.673,-42.427) 148.673,-34.85 v1(148.38,-34.557)
DIO: IC1.33 J2.4 J3.2 | length 33.4
  F.Cu w0.254: IC1.33@141.368,-31.177 145.437,-31.177 145.86,-31.6 v1(149.28,-31.6) ; J3.2@147.308,-41.157 147.33,-41.178 149.258,-41.178 v1(149.28,-41.2)
  B.Cu w0.254: v1(149.28,-31.6) v1(149.28,-41.2) 149.28,-51.7 150.168,-52.588 J2.4@150.168,-54.557
EXTAL: C8.1 IC1.10 Y1.2 | length 7.1
  F.Cu w0.25: C8.1@125.363,-31.247 125.363,-29.327 Y1.2@125.388,-29.302 126.263,-29.302 127.388,-28.177 IC1.10@130.018,-28.177